# Altium PCB LED.PcbDoc
Units mm, origin at the board's own origin, x right, y up, seen from the top; angles counter-clockwise.
Board outline 20 x 20 mm, 2 copper layers (Top Layer, Bottom Layer), stack 1.671 mm thick; 3 components, 3 nets, 6 pads, 1 vias.
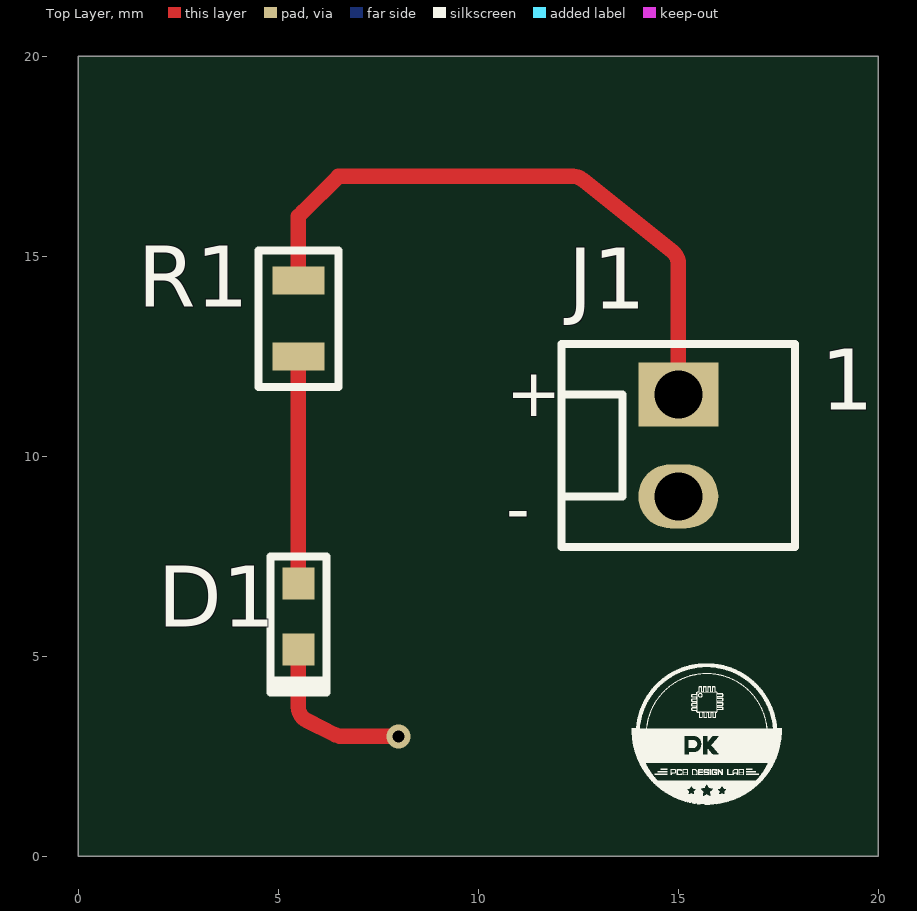
[diagram p0: Top Layer view]
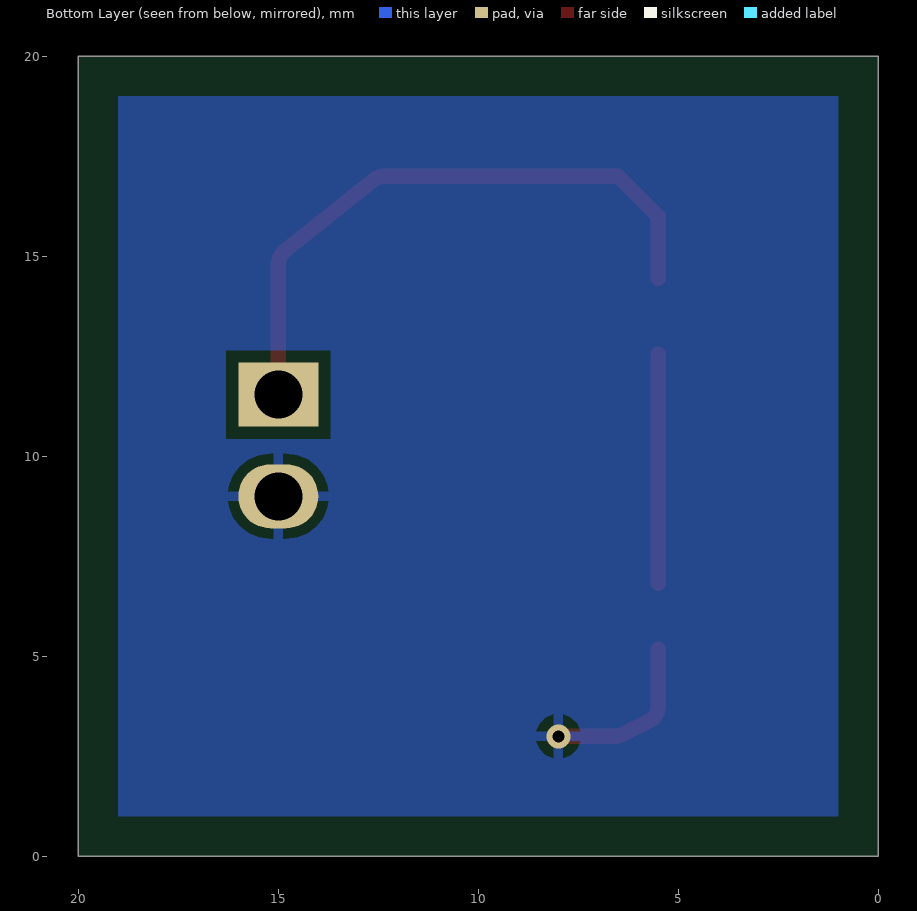
[diagram p1: Bottom Layer view, seen from below]
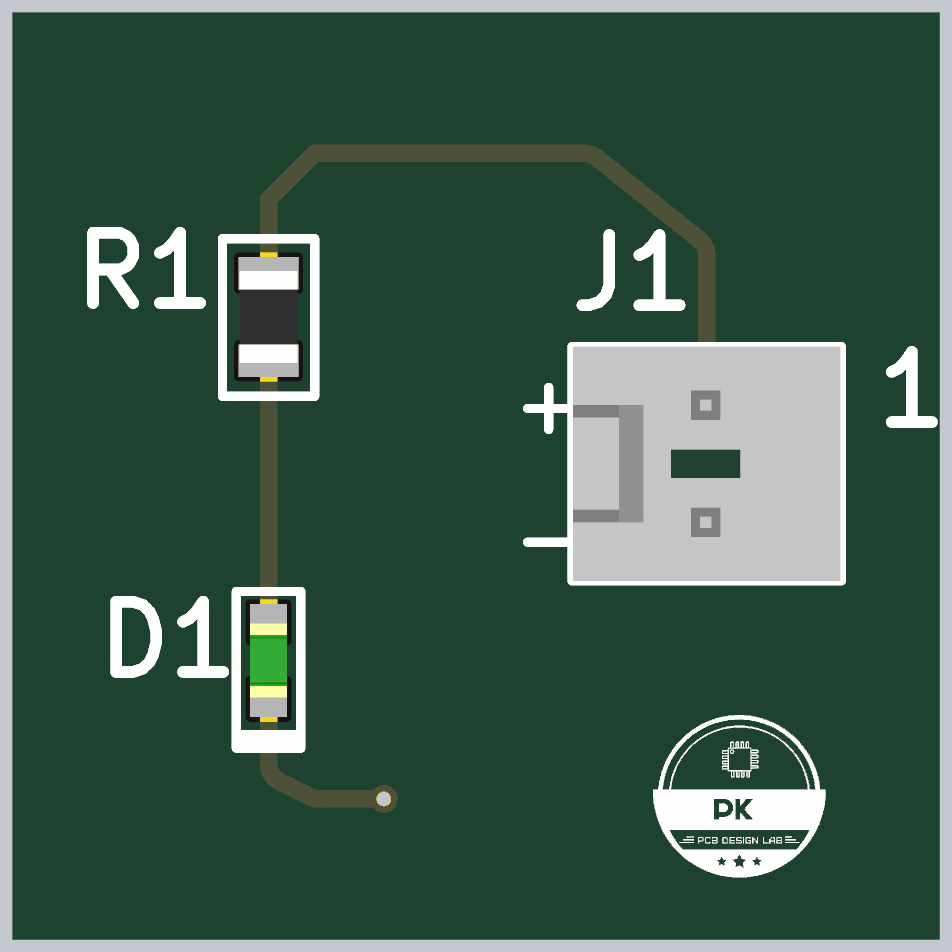
[diagram p2: 3D render of the assembled board from above, using the file's embedded part models]

## Layer stack, top to bottom
Top Solder: solder mask 0.0102, Solder Resist, Dk 3.5
Top Layer: signal copper 0.0356
Dielectric 1: dielectric 1.6, FR-4, Dk 4.8
Bottom Layer: signal copper 0.0356
Bottom Solder: solder mask 0.0102, Solder Resist, Dk 3.5

## Board outline
0,0 0,20 20,20 20,0

## Design rules (kind name [scope] priority, off if disabled: settings)
Clearance Clearance_1 [All] p1: gap=0.3 ignorepadtopadclearanceinfootprint=FALSE
Clearance [All] p2: gap=0.3 ignorepadtopadclearanceinfootprint=FALSE
Clearance Clearance_2 [All] p3: gap=0.3 ignorepadtopadclearanceinfootprint=FALSE
PolygonConnect [All] p1: connectstyle=Relief reliefconductorwidth=0.254 reliefentries=4 polygonreliefangle="90 Angle" airgapwidth=0.254
RoutingVias [All] p1: holewidth=0.3 width=0.6 viastyle="Through Hole" minholewidth=0.3 minwidth=0.6 maxholewidth=0.3 maxwidth=0.6
SilkToSolderMaskClearance [IsPad] p1: minsilkscreentomaskgap=0.1 clearancetoexposedcopper=TRUE
SolderMaskExpansion [All] p1: expansion=0.102 istentingtop=FALSE
Width [All] p1: maxlimit=1 minlimit=0.3 preferedwidth=0.5
29 further rules are at their usual default settings.

## Components (designator, comment, footprint, x,y, rotation, side; value= is the part's Value field where it differs from the comment)
D1 "GREEN" LED0603G 5.5,6 r90 top
J1 "1x2 Header" HDR1x2 15,11.54 r0 top
R1 "360R" R0805 5.5,13.45 r90 top

## Footprints (in the part's own frame and the unit in brackets; to place one, negate y for a bottom-side part, rotate by r counter-clockwise, add the part's x,y. Pads: shape width x height; smd on the part's side, far side on the other; paste and mask are expansions set on the pad)
HDR1x2 [mm]
  rect 2x1.6 hole 1.2: 1(0,0)
  oval 2x1.6 hole 1.2: 2(0,-2.54)
  silkscreen extent -2.92,-3.81 2.92,1.27, body extent -2.9,-3.81 2.9,1.27, height 11.71
LED0603G [mm]
  rect 0.8x0.8 smd: 1(-0.825,0) 2(0.825,0)
  silkscreen extent -1.9,-0.7 1.5,0.7, body extent -0.8,-0.4 0.8,0.4, height 0.4
R0805 [mm]
  rect 0.7x1.3 smd: 1(-0.95,0) 2(0.95,0)
  silkscreen extent -1.72,-1 1.7,1, body extent -1,-0.63 1,0.63, height 0.61

## Part data
D1: library part LNJ337W83RA, "Standard LEDs - SMD LED GR HI-BRT USS", Case Code (Imperial)=0603, Case Code (Metric)=1608, Colour=Green,Yellow, Forward Current=20mA, Forward Voltage=1.95V, Illumination Colour=Green, Manufacturer="Panasonic SSG", Max Operating Temperature=85°C, Max Power Dissipation=55mW, Min Operating Temperature=-30°C, Package Quantity=1, Reverse Voltage=4V, Supplier Part Number 1=LNJ337W83RADKR-ND, Test Current=5mA, Case/Package=0603, Category=Optoelectronics, ComponentLink1Description=https://datasheet.ciiva.com/6868/lnj337w83ra-aek-6868817.pdf, ComponentLink1URL=https://datasheet.ciiva.com/6868/lnj337w83ra-aek-6868817.pdf, ComponentLink2Description=https://datasheet.ciiva.com/4690/lnj337w83ra-aek-226051-4690026.pdf, ComponentLink2URL=https://datasheet.ciiva.com/4690/lnj337w83ra-aek-226051-4690026.pdf, ComponentLink3Description=https://datasheet.ciiva.com/11775/0900766b80f0a8bb-11775418.pdf, ComponentLink3URL=https://datasheet.ciiva.com/11775/0900766b80f0a8bb-11775418.pdf, Dominant Wavelength=572nm, Height=0.2mm, Lead Free="Lead Free", Length=1.6mm, Lens Style=Rectangular, Luminous Intensity=7.5mcd, Manufacturer Part Number=LNJ337W83RA, Mount="Surface Mount", Number of LEDs=1, Number of Pins=2, Packaging="Tape and Reel", Pricing 1="1=0.48, 10=0.343, 25=0.28, 100=0.2239, 250=0.18888, 500=0.1609, 1000=0.12593, 2500=0.11544 (USD)", REACH SVHC=Yes, Stock 1=200597, Supplier 1=Digi-Key, Wavelength=572nm, Width=0.8mm
J1: library part 0022292021, "KK 254 Wire-to-Board Header, Vertical, with Friction Lock, 2 Circuits, Gold (Au) Plating", Manufacturer=Molex, Supplier Part Number=WM2744-ND, Category=Connectors, ComponentLink1Description=https://datasheet.octopart.com/22-29-2021-Molex-datasheet-33002381.pdf?src-supplier=Newark, ComponentLink1URL=https://datasheet.octopart.com/22-29-2021-Molex-datasheet-33002381.pdf?src-supplier=Newark, ComponentLink2Description=https://datasheet.octopart.com/22-29-2021-Molex-datasheet-144804.pdf?src-supplier=Digikey, ComponentLink2URL=https://datasheet.octopart.com/22-29-2021-Molex-datasheet-144804.pdf?src-supplier=Digikey, Manufacturer Part Number=0022292021, Pricing="1=0.34, 10=0.286, 100=0.2225, 3000=0.18654 (USD)", RoHS=No, Stock=117221, Supplier=Digikey
R1: library part CRCW0805360RFKEA, "SMD Chip Resistor, 360 Ohm, ± 1%, 125 mW, 0805 [2012 Metric], Thick Film, General Purpose", Manufacturer=Vishay, Supplier Part Number=71-CRCW0805360RFKEA, Voltage Rating (DC)=150V, Category="Chip SMD Resistors", Caterogy=Resistor, ComponentLink1Description=https://datasheet.ciiva.com/2467/dcrcwe3-2467773.pdf?src-supplier=Digikey, ComponentLink1URL=https://datasheet.ciiva.com/2467/dcrcwe3-2467773.pdf?src-supplier=Digikey, Manufacturer Part Number=CRCW0805360RFKEA, Pricing="1=0.1, 10=0.025, 50=0.025, 100=0.015, 1000=0.012, 10000=0.008 (USD)", Reach SVHC Compliant=4187SVHC, RoHS=Yes, Stock=6377, Supplier=Mouser

## Via types
v1: diameter 0.6, hole 0.3, Top Layer to Bottom Layer, tented both sides, 1 vias

## Nets (pads, with @x,y where several pads share a name; then routed paths per layer and width w, separated by ;. In a path a pad name is that pad's centre, name@x,y a point inside that pad or via, vN(x,y) a via of type N, cw(c..) or ccw(c..) an arc to the next point about the centre after c; other vN are vias at no path point)
+3V: J1.1 R1.2 | length 15.6
  Top Layer w0.381: R1.2@5.5,14.45 5.5,15.842 5.5,16 5.612,16.112 6.5,17 ; 6.5,17 12.366,17 cw(c12.366,16.619) 12.604,16.917 ; 12.604,16.917 14.857,15.114 cw(c14.619,14.817) 15,14.817 J1.1
DIDOE: D1.2 R1.1 | length 5.7
  Top Layer w0.381: D1.2 R1.1@5.5,12.55
GND: D1.1 J1.2 | length 4.2
  Top Layer w0.381: D1.1 5.5,3.735 ccw(c5.881,3.735) 5.712,3.394 6.42,3.04 ; 6.42,3.04 ccw(c6.59,3.381) 6.59,3 v1(8,3)

## Polygon pours and split planes (outlines as drawn)
GND on Bottom Layer "GND_L02_P000" (solid, remove dead copper, pour order 0): 1,19 1,1 19,1 19,19

## Silkscreen, mask and mechanical layers (free items; w line width, h text height)
Top Overlay:
  drawing of 22 lines, arcs and shapes, not listed
  text "+" at 10.7,11 h1.2
  text "-" at 10.7,8.1 h1.2
Board Outline:
  the board outline again, w0.1

## Text inside footprints (layer, text, board x,y; h text height)
J1: Top Overlay "1" at 18.556,11.159 h1.52